# Altium PCB ESCv6.PcbDoc
Units mil, origin at the board's own origin, x right, y up, seen from the top; angles counter-clockwise.
Board outline 2086.61 x 866.14 mil, 2 copper layers (Top Layer, Bottom Layer); 51 components, 37 nets, 174 pads, 457 vias.
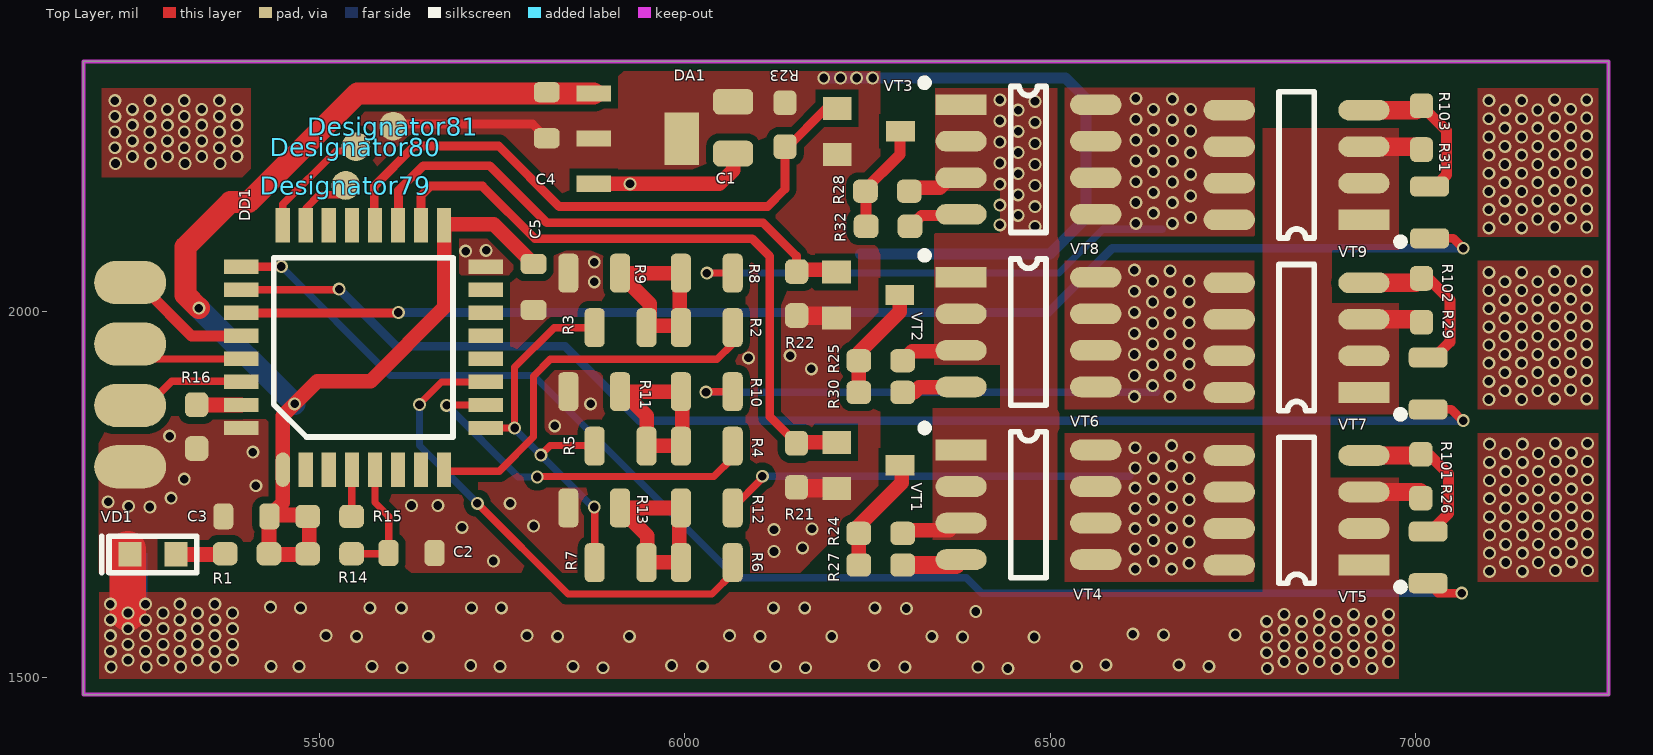
[diagram p0: Top Layer view]
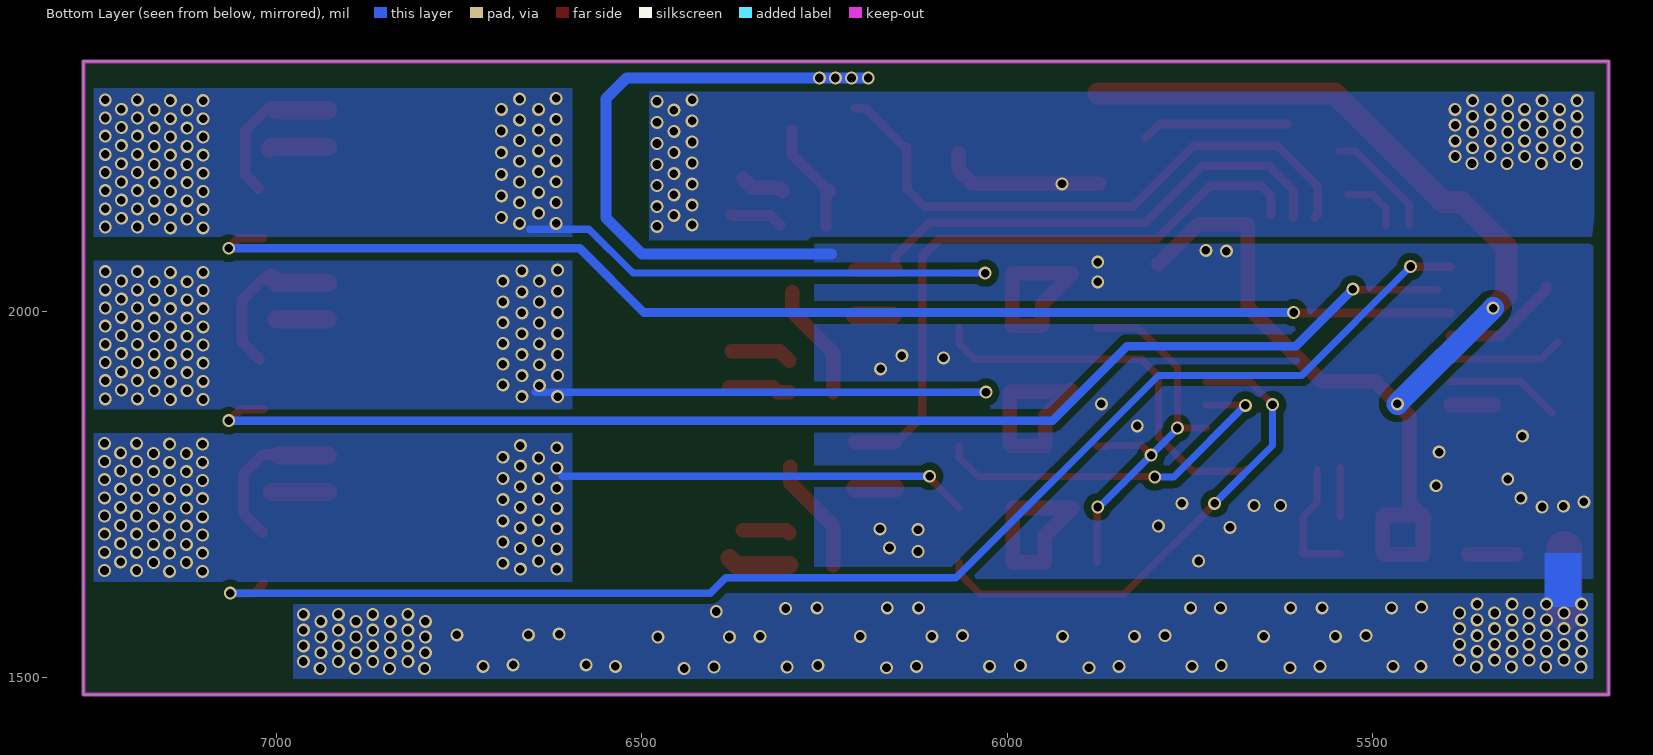
[diagram p1: Bottom Layer view, seen from below]
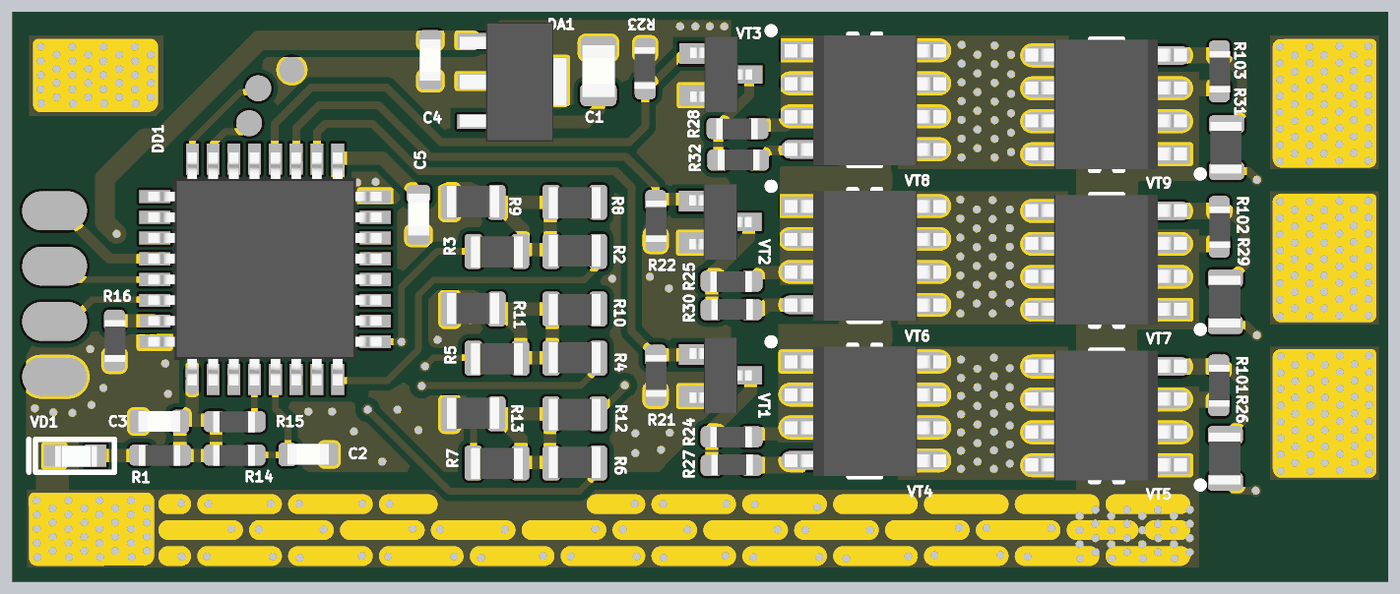
[diagram p2: 3D render of the assembled board from above, using the file's embedded part models]

## Layer stack, top to bottom
Top Solder: solder mask 0.4, Solder Resist, Dk 3.5
Top Layer: signal copper 1.4
Dielectric1: dielectric 12.6, FR-4, Dk 4.8
Bottom Layer: signal copper 1.4
Bottom Solder: solder mask 0.4, Solder Resist, Dk 3.5

## Board outline
5177.17,1476.38 5177.17,2342.52 7263.78,2342.52 7263.78,1476.38

## Design rules (kind name [scope] priority, off if disabled: settings)
Clearance [All] p1: gap=10
ComponentClearance [All] p1 off: gap=10 collisioncheckmode=3 verticalgap=10 showdistances=FALSE
FabricationTestPointUsage TestPointUsage [All] p1: valid=0 allowmultiple=FALSE
FabricationTestpoint Testpoint [All] p1: side=3 testpointundercomponent=TRUE minsize=40 maxsize=100 preferedsize=60 minholesize=0 maxholesize=40 preferedholesize=32 testpointgrid=1 allowsidetop=TRUE allowsidebottom=TRUE usegrid=TRUE gridtolerance=0.01
MinimumSolderMaskSliver [All] p1: minsoldermaskwidth=1.97
PolygonConnect PolygonVGNet [(InNet('GND') or InNet('POINT_A') or InNet('POINT_B') or InNet('POINT_C')) or InNet('VCC_POWER')] p1: connectstyle=Direct reliefconductorwidth=10 reliefentries=4 polygonreliefangle="90 Angle" airgapwidth=10
PolygonConnect [All] p2: connectstyle=Relief reliefconductorwidth=10 reliefentries=4 polygonreliefangle="90 Angle" airgapwidth=10
RoutingVias [All] p1: holewidth=28 width=50 viastyle="Through Hole" minholewidth=28 minwidth=50 maxholewidth=28 maxwidth=50
SilkToSolderMaskClearance SilkscreenOverComponentPads [IsPad] p1 off: minsilkscreentomaskgap=10 clearancetoexposedcopper=TRUE
SolderMaskExpansion [All] p1: expansion=4
Width [All] p1: maxlimit=300 minlimit=6 preferedwidth=20
24 further rules are at their usual default settings.

## Classes and differential pairs
component class ESC: C1 C2 C3 C4 C5 DA1 DD1 R1 R2 R3 R4 R5 R6 R7 R8 R9 R10 R11 R12 R13 R14 R15 R16 R21 R22 R23 R24 R25 R26 R27 R28 R29 R30 R31 R32 R101 R102 R103 VD1 VT1 VT2 VT3 VT4 VT5 VT6 VT7 VT8 VT9

## Components (designator, comment, footprint, x,y, rotation, side; value= is the part's Value field where it differs from the comment)
C1 "1uF" CAP0805 6066,2252 r90 top
C2 "0.1uF" CAP0603 5626,1670 r180 top
C3 "0.1uF" CAP0603 5400,1720 r180 top
C4 "0.1uF" CAP0603 5811,2269 r270 top
C5 "0.1uF" CAP0603 5793,2034 r90 top
DA1 "L78L33??" SOT89 5899,2237 r270 top
DD1 "STM32F051K8T" LQFP32-STM32 5450,1784 r90 top
Designator79 "Comment" TP 5536,2173 r0 top
Designator80 "Comment" TP 5550,2226 r0 top
Designator81 "Comment" TP 5601,2254 r0 top
R1 "1k" RES0603 5401,1669 r180 top
R2 "33k" RES0805 6030,1978.4 r0 top
R3 "33k" RES0805 5912,1978.4 r180 top
R4 "33k" RES0805 6030,1816.2 r0 top
R5 "33k" RES0805 5912,1816.2 r180 top
R6 "33k" RES0805 6030,1657 r0 top
R7 "33k" RES0805 5912,1657 r180 top
R8 "33k" RES0805 6030,2053 r180 top
R9 "12k" RES0805 5876,2053 r0 top
R10 "33k" RES0805 6030,1890.8 r180 top
R11 "12k" RES0805 5876,1890.8 r0 top
R12 "33k" RES0805 6030,1731.6 r180 top
R13 "12k" RES0805 5876,1731.6 r0 top
R14 "0" RES0603 5514,1669 r180 top
R15 "10k" RES0603 5514,1720 r180 top
R16 "10k" RES0603 5332,1843 r270 top
R21 "10k" RES0603 6152.75,1790.03 r270 top
R22 "10k" RES0603 6153,2025 r270 top
R23 "10k" RES0603 6137,2256 r90 top
R24 "2k" RES0603 6268.03,1696.85 r180 top
R25 "2k" RES0603 6268.03,1933.07 r180 top
R26 "100" RES0805 7017,1664 r90 top
R27 "100" RES0603 6268.03,1653.54 r0 top
R28 "2k" RES0603 6277,2165 r180 top
R29 "100" RES0805 7017,1902 r90 top
R30 "100" RES0603 6268.03,1889.76 r0 top
R31 "100" RES0805 7019,2136 r90 top
R32 "100" RES0603 6278,2117 r0 top
R101 "10k" RES0603 7007,1775 r270 top
R102 "10k" RES0603 7007.87,2015.75 r270 top
R103 "10k" RES0603 7007.87,2251.97 r270 top
VD1 "KP-1608SURC" "DIODE 1608" 5272,1668 r0 top
VT1 "BC817-25" SOT23 6294.48,1790.03 r270 top
VT2 "BC817-25" SOT23 6294,2023 r270 top
VT3 "BC817-25" SOT23 6295,2247 r270 top
VT4 "IRF9310PbF" "SO-8 IRF..." 6377.95,1811.02 r0 top
VT5 "IRF8736PbF" "SO-8 IRF..." 6929.13,1653.54 r180 top
VT6 "IRF9310PbF" "SO-8 IRF..." 6377.95,2047.24 r0 top
VT7 "IRF8736PbF" "SO-8 IRF..." 6929.13,1889.76 r180 top
VT8 "IRF9310PbF" "SO-8 IRF..." 6377.95,2283.46 r0 top
VT9 "IRF8736PbF" "SO-8 IRF..." 6929.13,2125.98 r180 top

## Footprints (in the part's own frame and the unit in brackets; to place one, negate y for a bottom-side part, rotate by r counter-clockwise, add the part's x,y. Pads: shape width x height; smd on the part's side, far side on the other; paste and mask are expansions set on the pad)
CAP0603 [mm]
  rrect50% 0.7x0.9 smd: 1(-0.8,0) 2(0.8,0)
  body extent -0.8,-0.41 0.8,0.39, height 0.9
CAP0805 [mm]
  rrect50% 0.9x1.4 smd: 1(-0.9,0) 2(0.9,0)
  body extent -0.99,-0.63 1.01,0.62, height 1.3
"DIODE 1608" [mm]
  rect 0.8x0.85 smd: 1(-0.8,0) 2(0.8,0)
  silkscreen extent -1.78,-0.64 1.52,0.64, body extent -0.77,-0.42 0.85,0.38, height 1.1
LQFP32-STM32 [mm] "STM32L052"
  oval 1.2x0.5 smd: 1(0,0)
  rect 1.2x0.5 smd: 2(0,-0.8) 3(0,-1.6) 4(0,-2.4) 5(0,-3.2) 6(0,-4) 7(0,-4.8) 8(0,-5.6) 17(8.5,-5.6) 18(8.5,-4.8) 19(8.5,-4) 20(8.5,-3.2) 21(8.5,-2.4) 22(8.5,-1.6) 23(8.5,-0.8) 24(8.5,0)
  rect 0.5x1.2 smd: 9(1.45,-7.05) 10(2.25,-7.05) 11(3.05,-7.05) 12(3.85,-7.05) 13(4.65,-7.05) 14(5.45,-7.05) 15(6.25,-7.05) 16(7.05,-7.05) 25(7.05,1.45) 26(6.25,1.45) 27(5.45,1.45) 28(4.65,1.45) 29(3.85,1.45) 30(3.05,1.45) 31(2.25,1.45) 32(1.45,1.45)
  silkscreen extent 1.13,-5.92 7.37,0.32, body extent -0.24,-7.3 8.76,1.7, height 1.6
RES0603 [mm]
  rrect50% 0.86x0.81 smd: 1(-0.762,0) 2(0.762,0)
  body extent -0.78,-0.38 0.82,0.42, height 0.45
RES0805 [mm]
  rrect50% 0.7x1.35 smd: 1(-0.9,0) 2(0.9,0)
  body extent -1,-0.58 1,0.62, height 0.5
"SO-8 IRF..." [mm]
  rect 1.78x0.72 smd: 1(0,0)
  oval 1.78x0.72 smd: 2(0,-1.27) 3(0,-2.54) 4(0,-3.81) 5(4.68,-3.81) 6(4.68,-2.54) 7(4.68,-1.27) 8(4.68,0)
  silkscreen extent -1.4,-4.44 2.96,0.89, body extent -0.75,-4.42 5.48,0.58, height 1.75
SOT23 [mm]
  rect 0.8x1 smd: 1(-0.8,-2.2) 2(0.8,-2.2)
  rect 0.7x1 smd: 3(0,0)
  body extent -1.44,-2.29 1.46,0.11, height 1.02
SOT89 [mm]
  rect 0.56x1.2 smd: 1(-1.57,-0.6) 2(0,-0.6) 3(1.57,-0.6)
  rect 1.83x1.2 smd: 2(0,2.45)
  body extent -2.27,-1.09 2.33,3.01, height 1.6
TP [mm] "Testpoint, Surface Mounting, Circular, Pad Diameter 1mm"
  round 1 smd: 1(0,0)

## Part data
C1 C2 C3 C4 C5: library part Capacitor
DA1: library part DA-L78L05, "LDO"
DD1: "LQFP32"
R1 R2 R3 R4 R5 R6 R7 R8 R9 R10 R11 R12 R13 R14 R15 R16 R21 R22 R23 R24 R25 R26 R27 R28 R29 R30 R31 R32 R101 R102 R103: library part Resistor
VD1: library part LED_0603
VT1 VT2 VT3: library part "VT - BC817", "NPN"
VT4 VT6 VT8: "P-MOSFET -20A"
VT5 VT7 VT9: "N-MOSFET 18A"

## Free pads (board coordinates)
  oval 98.43x59.06 smd: 43(5241,1872) 44(5241,1788) 45(5241,2040) 46(5241,1956)

## Via types
v1: diameter 17.72, hole 11.81, Top Layer to Bottom Layer, tented both sides, 457 vias

## Nets (pads, with @x,y where several pads share a name; then routed paths per layer and width w, separated by ;. In a path a pad name is that pad's centre, name@x,y a point inside that pad or via, vN(x,y) a via of type N, cw(c..) or ccw(c..) an arc to the next point about the centre after c; other vN are vias at no path point)
3V3: C3.1 C4.1 C5.2 DA1.1 DD1.1 DD1.17 R1.1 R14.2 R15.2 | length 1825.1
  Top Layer w20: C3.1@5429,1719 5432,1722 C3.1@5433,1722 ; C5.2 5792.73,2065.5 5738.23,2120 5671,2120 5671,2006 5570,1905 5497,1905 5450,1858 DD1.1 5450,1739 C3.1@5433,1722 ; C3.1@5433,1722 5484,1722 5486,1720 5486,1671 R14.2 5483,1668 5431,1668 R1.1 5431,1720 C3.1@5433,1722
  Top Layer w30: v1(5335,2005) 5317,2023 5317,2089 5378,2150 5403,2150 5551.81,2298.81 DA1.1
  Bottom Layer w30: v1(5335,2005) v1(5466,1874)
ADC_0: DD1.9 R3.2 R5.2 R7.2 | length 561.9
  Top Layer w10: DD1.9 v1@5766.91,1841.09 ; v1(5767,1841) 5767,1924 5821.4,1978.4 R3.2 ; v1(5803,1804) 5816,1817 5864.4,1817 5865.2,1816.2 R5.2 ; R7.2 v1@5876.57,1731.43
  Bottom Layer w10: v1(5767,1841) 5767,1840 v1@5875,1732
  other v1: 5876,1733
ADC_1: DD1.11 R6.2 | length 697.9
  Top Layer w10: v1@5637,1874 5667.08,1904.08 DD1.11 ; v1(5716,1738) 5840,1614 6037,1614 6065.43,1642.43 R6.2
  Bottom Layer w10: v1(5637,1873) 5637,1817 v1(5716,1738)
ADC_2: DD1.10 R4.2 | length 512.5
  Top Layer w10: v1@5674.58,1872.58 DD1.10 ; v1@5798,1774.63 6039.63,1774.63 6065.43,1800.43 R4.2
  Bottom Layer w10: v1(5674,1872) 5772,1774 v1(5798,1774) v1@5799,1774
ADC_3: DD1.8 R2.2 | length 536.5
  Top Layer w10: DD1.8@5673,1785 5676,1782 5746,1782 5793,1829 5793,1912 5816,1935 6044,1935 6065.43,1956.43 R2.2
GND: C1.2 C2.1 C3.2 C4.2 C5.1 DA1.2 DD1.16 DD1.32 Designator81.1 pad.44 R9.1 R11.1 R13.1 R16.2 R21.2 R22.2 R23.2 R101.2 R102.2 R103.2 VD1.1 VT1.2 VT2.2 VT3.2 VT5.1 VT5.2 VT5.3 VT7.1 VT7.2 VT7.3 VT9.1 VT9.2 VT9.3 | length 1485.2
  Top Layer w12: Designator81.1@5617,2257 5791.5,2257 C4.2
  Top Layer w25: R21.2@6153.46,1758.54 VT1.2 ; R22.2@6157.24,1994.76 VT2.2@6207.87,1994.76 ; VT5.3 R101.2@7005.46,1753.54 ; VT7.3 R102.2@6999.24,1989.76 ; VT9.3 7006.02,2225.98 R103.2@7009,2223
  Top Layer w50: v1(5238,1588) VD1.1@5238,1675
  Bottom Layer w15: v1(6190,2320) 6521,2320 6549,2292 6549,2128.5 6499.5,2079 6240,2079
  other v1: 6442,1512 6797,1512 6845,1512 6892,1512 6940,1512 5613,1513 5888,1513 6165,1513 5215,1514 5263,1514 5310,1514 5358,1514 6301,1514 6401,1514 5434,1515 5472,1515 5572,1515 5747,1515 5847,1515 6024,1515 6124,1515 6536,1515 6717,1515 5707,1516 5982,1516 6259,1516 6576,1517 6676,1517 6820,1521.5 6868,1521.5 6915,1521.5 6963,1521.5 5238,1523.5 5286,1523.5 5333,1523.5 5381,1523.5 6796,1533.5 6844,1533.5 6891,1533.5 6939,1533.5 5214,1535.5 5262,1535.5 5309,1535.5 5357,1535.5 6820,1543 6868,1543 6915,1543 6963,1543 5238,1545 5286,1545 5333,1545 5381,1545 6380,1555 6478,1555 6796,1555 6844,1555 6891,1555 6939,1555 5551,1556 5649,1556 5826,1556 5924,1556 6103,1556 6201,1556 6338,1556 5214,1557 5262,1557 5309,1557 5357,1557 5509,1557 5784,1557 6061,1557 6655,1558 6753,1558 6613,1559 6820,1564.5 6868,1564.5 6915,1564.5 6963,1564.5 5238,1566.5 5286,1566.5 5333,1566.5 5381,1566.5 6796,1576.5 6844,1576.5 6891,1576.5 6939,1576.5 5214,1578.5 5262,1578.5 5309,1578.5 5357,1578.5 6820,1586 6868,1586 6915,1586 6963,1586 5286,1588 5333,1588 5381,1588 6398,1590 6303,1594 5474,1595 5569,1595 5612,1595 5708,1595 5749,1595 6121,1595 6164,1595 6260,1595 5433,1596 5214,1600 5262,1600 5309,1600 5357,1600 5738,1659 6122,1672 6161,1677 6122,1702 6174,1703 5695,1705 5793,1707 5268,1733 5239,1734 5626,1735 5662,1735 5761,1738 5211,1740 5297,1745 5413,1762 5315,1771 5409,1808 5295,1830 5822,1844 5871,1874 6173,1922 6087,1937 6144,1940 5876,2041 5876,2068 5700,2083 5728,2084 6213,2320 6235,2320 6257,2320
NetC2_2: C2.2 DD1.5 R14.1 | length 174.7
  Top Layer w10: R14.1 5595,1669 C2.2@5597,1671 ; DD1.5 5575.98,1739.02 5595,1720 C2.2@5595,1671
NetDD1_4: DD1.4 R15.1 | length 67
  Top Layer w10: R15.1 DD1.4@5544,1787
NetDD1_28: DD1.28 pad.45 | length 161.5
  Top Layer w15: pad.45@5263,2035 5263,2029.04 5324.97,1967.07 DD1.28
NetDD1_31: DD1.31 R16.1 | length 58.5
  Top Layer w20: R16.1@5334.42,1872.58 DD1.31
NetR1_2: R1.2 VD1.2 | length 65.5
  Top Layer w20: VD1.2 R1.2@5369,1668
NetR2_1: R2.1 R3.1 R8.2 R9.2 | length 281.1
  Top Layer w20: R9.2 5993,2053 5993,1981 5952,1981 5952,2011 R9.2@5912,2051
NetR4_1: R4.1 R5.1 R10.2 R11.2 | length 296
  Top Layer w20: R11.2 R11.2@5915.2,1890.8 ; R11.2@5913,1893 R11.2@5915.2,1890.8 ; R11.2@5915.2,1890.8 5948,1858 5948,1817 5994,1817 5996.2,1819.2 5996.2,1890.8 R10.2 R11.2@5915.2,1890.8
NetR6_1: R6.1 R7.1 R12.2 R13.2 | length 289.2
  Top Layer w20: R13.2@5910,1732 5948.6,1693.4 5948.6,1657.6 5992.4,1657.6 5992.4,1731.6 R13.2
NetR24_2: R24.2 R27.1 VT1.3 | length 158.9
  Top Layer w20: R27.1 R24.2 6238.03,1707.03 6297,1766 VT1.3@6297,1788
NetR25_2: R25.2 R30.1 VT2.3 | length 160.4
  Top Layer w20: R30.1 R25.2 6238.03,1944.03 6294,2000 VT2.3@6294,2027
NetR26_2: R26.2 R101.1 VT5.4 | length 207.4
  Top Layer w15: R101.1 7018,1805 7045,1778 7045,1724 R26.2@7019,1698
  Top Layer w25: VT5.4 R101.1@6996.54,1803.54
NetR27_2: R27.2 VT4.4 | length 85.9
  Top Layer w25: R27.2 6370.54,1653.54 VT4.4@6380,1663
NetR28_2: R28.2 R32.1 VT3.3 | length 155.9
  Top Layer w15: R28.2@6244,2165 6294.48,2215.48 VT3.3@6294.48,2249 ; R32.1 R28.2@6248,2166
  Top Layer w20: R28.2@6244,2165 R28.2@6246,2165
NetR29_2: R29.2 R102.1 VT7.4 | length 223
  Top Layer w15: R102.1 7017.25,2045.75 7047,2016 7047,1959 R29.2@7023,1935
  Top Layer w25: VT7.4 6999.76,2039.76 R102.1@7006.81,2046.81
NetR30_2: R30.2 VT6.4 | length 85
  Top Layer w20: R30.2 6313.76,1889.76 6321,1897 VT6.4@6380,1897
NetR31_2: R31.2 R103.1 VT9.4 | length 205.4
  Top Layer w15: R103.1 7042,2247.84 7042,2187 R31.2@7024,2169
  Top Layer w25: VT9.4 R103.1@6999.98,2275.98
NetR32_2: R32.2 VT8.4 | length 74.4
  Top Layer w15: R32.2@6310,2118 6323.56,2131.56 6376.04,2131.56 VT8.4
OUT_A0: DD1.25 R26.1 | length 1905.9
  Top Layer w12: DD1.25 v1@5447,2061.56 ; R26.1 7030.57,1615 v1(7063,1615)
  Bottom Layer w10: v1(5448,2062) 5597,1913 5793,1913 6070,1636 6385,1636 6406,1615 v1(7063,1615)
OUT_A1: DD1.18 R21.1 VT1.1 | length 873.7
  Top Layer w12: DD1.18@5639,2132 5639,2159 5652,2172 5723,2172 5795,2100 6092,2100 6116,2076 6116,1856.78 R21.1
  Top Layer w20: R21.1@6154.47,1821.53 VT1.1
OUT_B0: DD1.26 R29.1 | length 1783.5
  Top Layer w10: DD1.26@5409.91,2030.06 v1@5526,2030.06
  Top Layer w12: R29.1 7048.43,1866.57 v1@7065,1850
  Bottom Layer w12: v1(5527,2031) 5605,1953 5836,1953 5938,1851 v1(7065,1851)
OUT_B1: DD1.19 R22.1 VT2.1 | length 722.2
  Top Layer w12: DD1.19@5608,2129 5608,2166 5642,2200 5733,2200 5811,2122 6107,2122 6152.75,2076.25 6152.75,2057.75 R22.1@6152.75,2056.25
  Top Layer w20: R22.1@6152.75,2057.75 VT2.1@6207.87,2057.75
OUT_C0: DD1.27 R31.1 | length 1759.2
  Top Layer w12: DD1.27 v1@5607,1998.57 ; R31.1 7051.43,2100.57 v1(7065,2087)
  Bottom Layer w12: v1(5608,1999) 6497,1999 6585,2087 v1(7065,2087)
OUT_C1: DD1.20 R23.1 VT3.1 | length 824.4
  Top Layer w12: DD1.20@5579,2129 5575,2133 5575,2172 5630,2227 5745,2227 5828,2144 6113,2144 6137,2168 R23.1 ; R23.1@6138.5,2223.5 6193.5,2278.5 VT3.1
POINT_A: R12.1 VT4.5 VT4.6 VT4.7 VT4.8 VT5.5 VT5.6 VT5.7 VT5.8 | length 563.2
  Top Layer w10: R12.1 6106,1772.17 v1(6106,1775)
  Bottom Layer w10: v1(6106,1775) 6609,1775
  other v1: 7101,1645 7146,1645 7191,1646 7235,1646 6616,1648 6666,1648 6690,1656 7123,1657 7168,1657 7213,1658 6641,1659 7101,1669.86 7146,1669.86 7191,1670.86 7235,1670.86 6616,1675.67 6666,1676.17 7123,1681.86 7168,1681.86 7213,1682.86 6690,1685 6641,1687.2 7101,1694.71 7146,1694.71 7191,1695.71 7235,1695.71 6616,1703.33 6666,1704.33 7123,1706.71 7168,1706.71 7213,1707.71 6690,1714 6641,1715.4 7101,1719.57 7146,1719.57 7191,1720.57 7235,1720.57 6616,1731 6666,1732.5 7123,1731.57 7168,1731.57 7213,1732.57 6690,1743 6641,1743.6 7101,1744.43 7146,1744.43 7191,1745.43 7235,1745.43 7123,1756.43 7168,1756.43 7213,1757.43 6616,1758.67 6666,1760.67 7101,1769.29 7146,1769.29 7191,1770.29 7235,1770.29 6641,1771.8 6690,1772 7123,1781.29 7168,1781.29 7213,1782.29 6616,1786.33 6666,1788.83 7101,1794.14 7146,1794.14 7191,1795.14 7235,1795.14 6641,1800 6690,1801 7123,1806.14 7168,1806.14 7213,1807.14 6616,1814 6666,1817 7101,1819 7146,1819 7191,1820 7235,1820
POINT_B: R10.1 VT6.5 VT6.6 VT6.7 VT6.8 VT7.5 VT7.6 VT7.7 VT7.8 | length 652.2
  Top Layer w10: v1@6030.2,1890.8 R10.1
  Bottom Layer w10: v1(6029,1890) 6646,1890
  other v1: 7100,1880 7145,1880 7190,1881 7234,1881 6615,1884 6664,1884 7122,1892 7167,1892 7212,1893 6640,1899 6690,1900 7100,1904.86 7145,1904.86 7190,1905.86 7234,1905.86 6615,1912.83 6664,1912.67 7122,1916.86 7167,1916.86 7212,1917.86 6640,1927.6 6690,1928.4 7100,1929.71 7145,1929.71 7190,1930.71 7234,1930.71 6664,1941.33 6615,1941.67 7122,1941.71 7167,1941.71 7212,1942.71 7100,1954.57 7145,1954.57 6640,1956.2 7190,1955.57 7234,1955.57 6690,1956.8 7122,1966.57 7167,1966.57 7212,1967.57 6615,1970.5 6664,1970 7100,1979.43 7145,1979.43 7190,1980.43 7234,1980.43 6640,1984.8 6690,1985.2 7122,1991.43 7167,1991.43 7212,1992.43 6615,1999.33 6664,1998.67 7100,2004.29 7145,2004.29 7190,2005.29 7234,2005.29 6640,2013.4 6690,2013.6 7122,2016.29 7167,2016.29 7212,2017.29 6664,2027.33 6615,2028.17 7100,2029.14 7145,2029.14 7190,2030.14 7234,2030.14 7122,2041.14 7167,2041.14 6640,2042 6690,2042 7212,2042.14 7100,2054 7145,2054 7190,2055 7234,2055 6664,2056 6615,2057
POINT_C: R8.1 VT8.5 VT8.6 VT8.7 VT8.8 VT9.5 VT9.6 VT9.7 VT9.8 | length 681.8
  Top Layer w10: v1@6032,2053 R8.1
  Bottom Layer w10: v1(6030,2053) 6512,2053 6572,2113 6653.54,2113
  other v1: 7100,2115 7145,2115 7190,2116 7234,2116 6617,2121 6667,2121 7122,2127 7167,2127 7212,2128 6692,2129 6641,2135 7100,2139.86 7145,2139.86 7190,2140.86 7234,2140.86 6667,2149.33 6617,2149.5 7122,2151.86 7167,2151.86 7212,2152.86 6692,2158.6 6641,2163.4 7100,2164.71 7145,2164.71 7190,2165.71 7234,2165.71 7122,2176.71 7167,2176.71 6617,2178 6667,2177.67 7212,2177.71 6692,2188.2 7100,2189.57 7145,2189.57 7190,2190.57 7234,2190.57 6641,2191.8 7122,2201.57 7167,2201.57 7212,2202.57 6617,2206.5 6667,2206 7100,2214.43 7145,2214.43 7190,2215.43 7234,2215.43 6692,2217.8 6641,2220.2 7122,2226.43 7167,2226.43 7212,2227.43 6667,2234.33 6617,2235 7100,2239.29 7145,2239.29 7190,2240.29 7234,2240.29 6692,2247.4 6641,2248.6 7122,2251.29 7167,2251.29 7212,2252.29 6667,2262.67 6617,2263.5 7100,2264.14 7145,2264.14 7190,2265.14 7234,2265.14 7122,2276.14 7167,2276.14 6641,2277 6692,2277 7212,2277.14 7100,2289 7145,2289 7190,2290 7234,2290 6667,2291 6617,2292
SYS_SWCLK: DD1.24 Designator80.1 | length 154.6
  Top Layer w10: DD1.24 5450,2147 5523,2220 Designator80.1@5546,2220
SYS_SWDIO: DD1.23 Designator79.1 | length 83.2
  Top Layer w10: DD1.23 5481.5,2141.83 5499.67,2160 Designator79.1@5534,2160
UART_RX: DD1.30 pad.43 | length 156
  Top Layer w10: pad.43@5255,1862 5297.93,1904.93 5392.06,1904.93 DD1.30
UART_TX: DD1.29 pad.46 | length 156.6
  Top Layer w10: pad.46@5246,1959 5269.43,1935.57 DD1.29
VCC_POWER: C1.1 DA1.3 R24.1 R25.1 R28.1 VT4.1 VT4.2 VT4.3 VT6.1 VT6.2 VT6.3 VT8.1 VT8.2 VT8.3 | length 433.5
  Top Layer w20: DA1.3@5874,2175 6047,2175 6066,2194 C1.1 ; R24.1 6302.18,1701 VT4.3@6362,1701 ; R25.1 6310.96,1946 VT6.3@6377,1946 ; R28.1 6312,2170 6349,2170 VT8.3@6361,2182
  other v1: 6479,2117 6431,2119 6456,2132 6479,2144 6431,2146 6456,2160 6479,2172.8 5925,2175 6431,2174.8 6456,2189 6479,2201.6 5221,2203 5269,2203 5316,2203 5364,2203 6431,2203.6 5244,2212.5 5292,2212.5 5339,2212.5 5387,2212.5 6456,2218 5220,2224.5 5268,2224.5 5315,2224.5 5363,2224.5 6479,2230.4 6431,2232.4 5244,2234 5292,2234 5339,2234 5387,2234 5220,2246 5268,2246 5315,2246 5363,2246 6456,2247 5244,2255.5 5292,2255.5 5339,2255.5 5387,2255.5 6479,2259.2 6431,2261.2 5220,2267.5 5268,2267.5 5315,2267.5 5363,2267.5 6456,2276 5244,2277 5292,2277 5339,2277 5387,2277 6479,2288 5220,2289 5268,2289 5315,2289 5363,2289 6431,2290
pads on no net: DD1.2 DD1.3 DD1.6 DD1.7 DD1.12 DD1.13 DD1.14 DD1.15 DD1.21 DD1.22

## Polygon pours and split planes (outlines as drawn)
GND on Top Layer "Top Overlay-No Net" (solid, remove dead copper, pour order 30): 5198.15,1643.27 5404.83,1643.27 6157.58,1643.27 6267,1754.62 6267,1783.49 6267,2340.24 6109.96,2340.24 5198.15,2340.24 5197.14,2341.27
VCC_POWER on Top Layer "Top Overlay-No Net" (solid, pour order 16): 5406,2184 5406,2306 5202,2306 5202,2259.72 5202,2184
GND on Top Layer "Top Overlay-No Net" (solid, pour order 16): 6796,1498 6796,1616 5199,1616 5199,1571.24 5199,1498
GND on Top Layer "Top Overlay-No Net" (solid, pour order 16): 6977,1498 6977,1635 6791,1635 6791,1583.03 6791,1498
POINT_C on Top Layer "Top Overlay-No Net" (solid, pour order 16): 7250,2103 7250,2306 7085,2306 7085,2229 7085,2103
POINT_B on Top Layer "Top Overlay-No Net" (solid, pour order 16): 7250,1867 7250,2070 7085,2070 7085,1993 7085,1867
POINT_A on Top Layer "Top Overlay-No Net" (solid, pour order 16): 7250,1631 7250,1834 7085,1834 7085,1757 7085,1631
VCC_POWER on Top Layer "Top Overlay-No Net" (solid, pour order 10): 6339,1705.31 6339,1688 6410.03,1688 6512,1688 6512,1744 6512,2306 6343.58,2306 6342.44,2306 6342.44,2251.02 6342.44,2165.5 6404.3,2165.5 6431.8,2165.5 6431.8,2107.47 6342.44,2107.47 6341.29,2106.45 6341.29,1927.26 6431.8,1927.26 6431.8,1868.21 6340.15,1868.21 6339,1868.21
POINT_C on Top Layer "Top Overlay-No Net" (solid, pour order 4): 6520,2306.54 6779.64,2306.54 6779.64,2104.58 6778.69,2103.54 6628.02,2103.54 6520,2103.54
POINT_B on Top Layer "Top Overlay-No Net" (solid, pour order 4): 6520,2070 6779,2070 6779,1868.04 6778.05,1867 6627.76,1867 6520,1867
POINT_A on Top Layer "Top Overlay-No Net" (solid, pour order 4): 6520,1834 6779,1834 6779,1632.04 6778.05,1631 6627.76,1631 6520,1631
GND on Top Layer "Top Overlay-No Net" (solid, pour order 2): 6977,1632 6977,1773 6883,1773 6883,1859 6884,1860 6977,1860 6977,2012 6885,2012 6885,2083 6887,2085 6977,2085 6977,2251 6890,2251 6791,2251 6791,2023 6791,1632
GND on Bottom Layer "Top Overlay-No Net" (solid, pour order 32): 5198,1635 5269,1635 6264,1635 6264,1778 6264,2095 6263,2094 5198,2094
VCC_POWER on Bottom Layer "Top Overlay-No Net" (solid, pour order 16): 6489.5,2098 6489.5,2301 5196.5,2301 5196.5,2224 5196.5,2098
GND on Bottom Layer "Top Overlay-No Net" (solid, pour order 16): 6977,1498 6977,1615 5198,1615 5198,1570.62 5198,1498
POINT_C on Bottom Layer "Top Overlay-No Net" (solid, pour order 12): 6595,2306 7249.12,2306 7250,2306 7250,2283.89 7250,2103 6595,2103
POINT_B on Bottom Layer "Top Overlay-No Net" (solid, pour order 12): 6595,2070 7249.12,2070 7250,2070 7250,2047.89 7250,1867 6595,1867
POINT_A on Bottom Layer "Top Overlay-No Net" (solid, pour order 12): 6595,1834 7249.12,1834 7250,1834 7250,1811.89 7250,1631 6595,1631
no net on Top Solder "Top Overlay-No Net" (solid): 5208,2293 cw(c5215.24,2293) 5210.12,2298.12 5211,2299 cw(c5215.83,2294.17) 5215.83,2301 5216,2301 5386.76,2301 cw(c5386.76,2290.76) 5394,2298 cw(c5384.34,2288.34) 5398,2288.34 5398,2283 5398,2204.66 cw(c5384.34,2204.66) 5394,2195 5393.95,2194.95 cw(c5382,2206.9) 5382,2190 5219.24,2190 cw(c5219.24,2200.24) 5212,2193 cw(c5221.66,2202.66) 5208,2202.66 5208,2205
VCC_POWER on Top Solder "Top Overlay-No Net" (solid): 5202,1604 cw(c5209.24,1604) 5204.12,1609.12 5205,1610 cw(c5209.83,1605.17) 5209.83,1612 5210,1612 5380.76,1612 cw(c5380.76,1601.76) 5388,1609 cw(c5378.34,1599.34) 5392,1599.34 5392,1594 5392,1515.66 cw(c5378.34,1515.66) 5388,1506 5387.95,1505.95 cw(c5376,1517.9) 5376,1501 5213.24,1501 cw(c5213.24,1511.24) 5206,1504 cw(c5215.66,1513.66) 5202,1513.66 5202,1516
no net on Top Solder "Top Overlay-No Net" (solid): 7088.91,2288.76 7088.91,2289.51 cw(c7099.15,2289.51) 7091.91,2296.76 cw(c7101.57,2287.1) 7101.57,2300.76 7103.91,2300.76 7239.08,2300.76 cw(c7239.08,2293.93) 7243.91,2298.76 cw(c7239.08,2293.93) 7245.91,2293.93 7245.91,2288.76 7245.91,2116 cw(c7235.67,2116) 7242.91,2108.76 cw(c7235.67,2116) 7235.67,2105.76 7234.91,2105.76 7101.15,2105.76 cw(c7101.15,2116) 7093.91,2108.76 cw(c7105.98,2120.83) 7088.91,2120.83 7088.91,2130.76
no net on Top Solder "Top Overlay-No Net" (solid): 7088.91,2053.76 7088.91,2054.51 cw(c7099.15,2054.51) 7091.91,2061.76 cw(c7101.57,2052.1) 7101.57,2065.76 7103.91,2065.76 7239.08,2065.76 cw(c7239.08,2058.93) 7243.91,2063.76 cw(c7239.08,2058.93) 7245.91,2058.93 7245.91,2053.76 7245.91,1881 cw(c7235.67,1881) 7242.91,1873.76 cw(c7235.67,1881) 7235.67,1870.76 7234.91,1870.76 7101.15,1870.76 cw(c7101.15,1881) 7093.91,1873.76 cw(c7105.98,1885.83) 7088.91,1885.83 7088.91,1895.76
no net on Top Solder "Top Overlay-No Net" (solid): 7088.91,1817.76 7088.91,1818.51 cw(c7099.15,1818.51) 7091.91,1825.76 cw(c7101.57,1816.1) 7101.57,1829.76 7103.91,1829.76 7239.08,1829.76 cw(c7239.08,1822.93) 7243.91,1827.76 cw(c7239.08,1822.93) 7245.91,1822.93 7245.91,1817.76 7245.91,1645 cw(c7235.67,1645) 7242.91,1637.76 cw(c7235.67,1645) 7235.67,1634.76 7234.91,1634.76 7101.15,1634.76 cw(c7101.15,1645) 7093.91,1637.76 cw(c7105.98,1649.83) 7088.91,1649.83 7088.91,1659.76

## Keep-outs
Keep-Out Layer:
  lines w6: 5177.17,1476.38 5177.17,2342.52 7263.78,2342.52 7263.78,1673.23 7263.78,1574.8 7263.78,1476.38 5177.17,1476.38

## Other copper
Bottom Layer:
  rectangle net GND: 5214,1596 5265,1670

## Silkscreen, mask and mechanical layers (free items; w line width, h text height)
Top Solder:
  lines w30: 5413.39,1515.75 5433.07,1515.75 ; 5413.39,1555.12 5511.81,1555.12 ; 5413.39,1594.49 5433.07,1594.49 ; 5472.44,1515.75 5570.87,1515.75 ; 5472.44,1594.49 5570.87,1594.49 ; 5551.18,1555.12 5649.61,1555.12 ; 5610.24,1515.75 5708.66,1515.75 ; 5610.24,1594.49 5708.66,1594.49 ; 5688.98,1555.12 5787.4,1555.12 ; 5748.03,1515.75 5846.46,1515.75 ; 5748.03,1594.49 5807.09,1594.49 ; 5826.77,1555.12 5925.2,1555.12 ; 5885.83,1515.75 5984.25,1515.75 ; 5964.57,1555.12 6062.99,1555.12 ; 6023.62,1515.75 6122.05,1515.75 ; 6062.99,1594.49 6122.05,1594.49 ; 6102.36,1555.12 6200.79,1555.12 ; 6161.42,1515.75 6259.84,1515.75 ; 6161.42,1594.49 6259.84,1594.49 ; 6240.16,1555.12 6338.58,1555.12 ; 6299.21,1515.75 6397.64,1515.75 ; 6299.21,1594.49 6397.64,1594.49 ; 6377.95,1555.12 6476.38,1555.12 ; 6437.01,1515.75 6535.43,1515.75 ; 6437.01,1594.49 6535.43,1594.49 ; 6515.75,1555.12 6614.17,1555.12 ; 6574.8,1515.75 6673.23,1515.75 ; 6574.8,1594.49 6673.23,1594.49 ; 6653.54,1555.12 6751.97,1555.12 ; 6712.6,1515.75 6811.02,1515.75 ; 6712.6,1594.49 6811.02,1594.49 ; 6791.34,1555.12 6870.08,1555.12 ; 6850.39,1515.75 6948.82,1515.75 ; 6850.39,1594.49 6948.82,1594.49 ; 6909.45,1555.12 6948.82,1555.12
Bottom Solder:
  rectangle: 5198,2034 5373,2093
  rectangle: 5197,2103 5372,2162